# Altium PCB Bodge85_8.PcbDoc
Units mm, origin at the board's own origin, x right, y up, seen from the top; angles counter-clockwise.
Board outline 80 x 50 mm, 2 copper layers (Top Layer, Bottom Layer), stack 1.631 mm thick; 2 components, 30 nets, 167 pads, 0 vias.
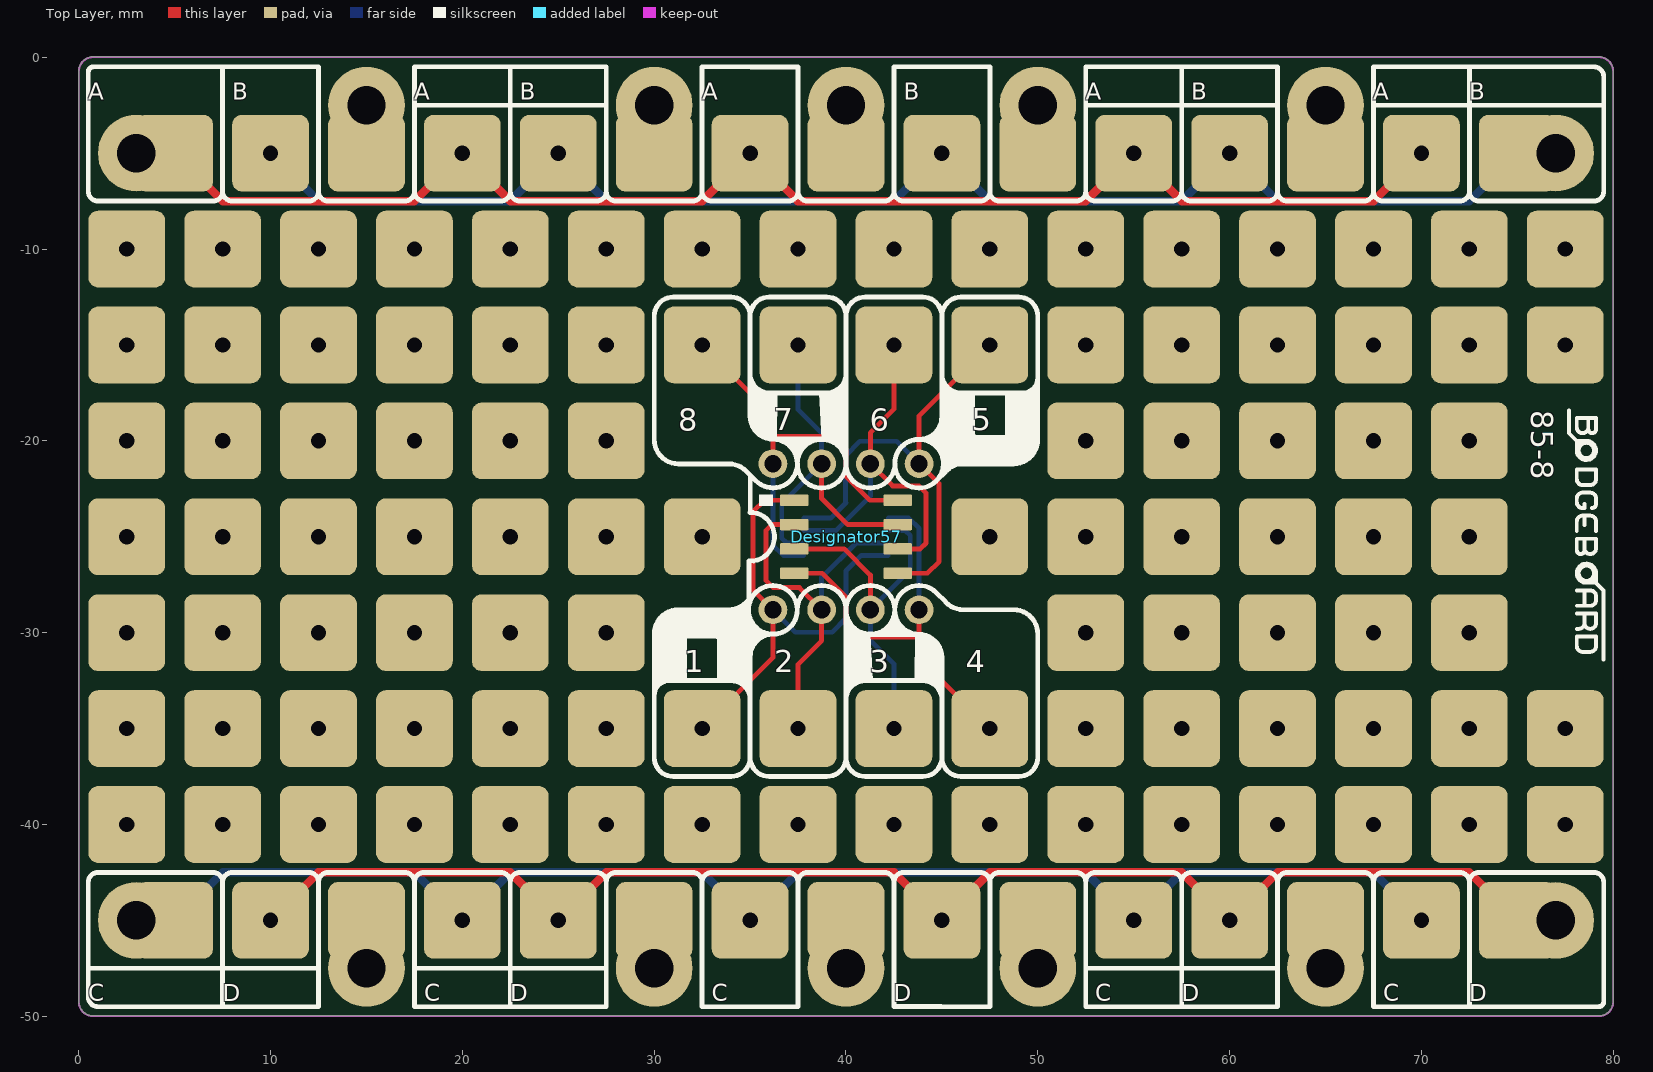
[diagram p0: Top Layer view]
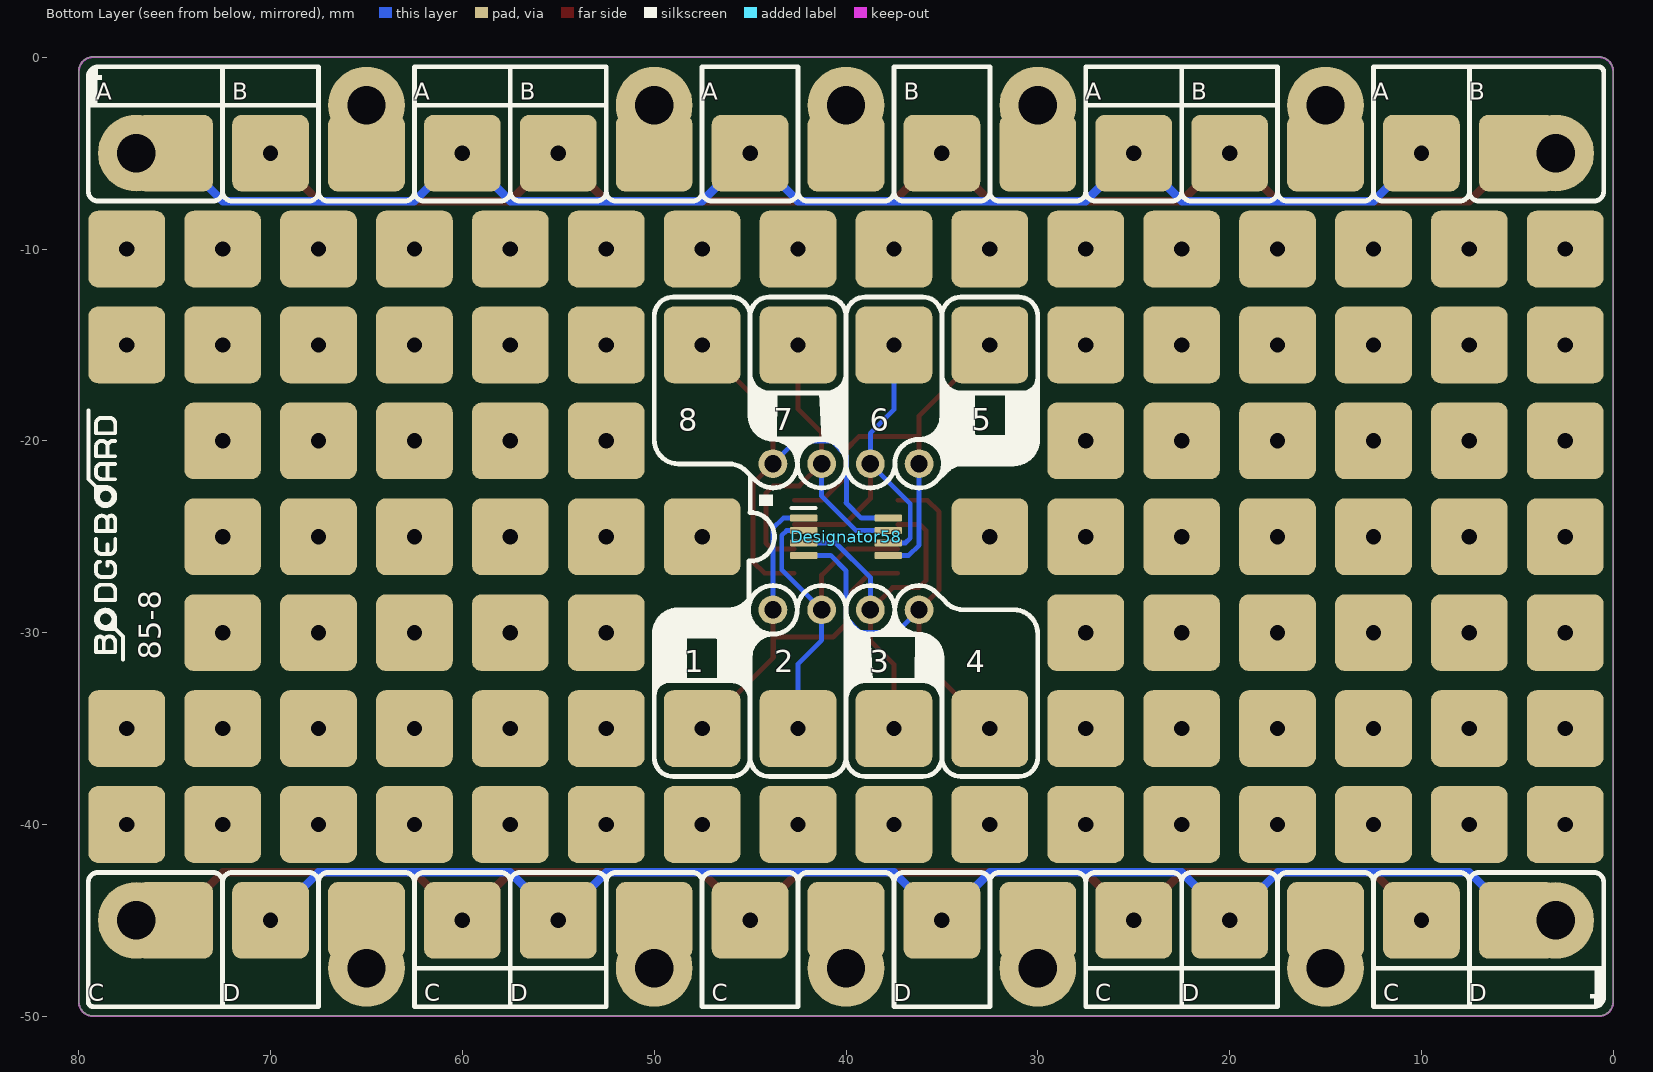
[diagram p1: Bottom Layer view, seen from below]

## Layer stack, top to bottom
Top Solder: solder mask 0.0102, Solder Resist, Dk 3.5
Top Layer: signal copper 0.0356
Dielectric 1: dielectric 1.56, FR-4, Dk 4.8
Bottom Layer: signal copper 0.0356
Bottom Solder: solder mask 0.0102, Solder Resist, Dk 3.5

## Board outline
0.75,-49.975 cw(c0.75,-49.225) 0,-49.225 0,-0.725 cw(c0.75,-0.725) 0.75,0.025 79.25,0.025 cw(c79.25,-0.725) 80,-0.725 80,-49.225 cw(c79.25,-49.225) 79.25,-49.975

## Design rules (kind name [scope] priority, off if disabled: settings)
Clearance [All] p1: gap=0.2 ignorepadtopadclearanceinfootprint=FALSE
MinimumSolderMaskSliver [All] p1: minsoldermaskwidth=0.15
PolygonConnect [All] p1: connectstyle=Relief reliefconductorwidth=0.254 reliefentries=4 polygonreliefangle="90 Angle" airgapwidth=0.254
RoutingVias [All] p1: holewidth=0.4 width=0.8 viastyle="Through Hole" minholewidth=0.3 minwidth=0.4 maxholewidth=0.7 maxwidth=1
SilkToSilkClearance [All] p1 off: silktosilkclearance=0
SilkToSolderMaskClearance [IsPad] p1: minsilkscreentomaskgap=0.15 clearancetoexposedcopper=TRUE
SolderMaskExpansion [All] p1: expansion=0.102 istentingtop=FALSE
Width [All] p1: maxlimit=1 minlimit=0.2 preferedwidth=0.5
27 further rules are at their usual default settings.

## Components (designator, comment, footprint, x,y, rotation, side; value= is the part's Value field where it differs from the comment)
Designator57 "Comment" SO127P600X500-8 40,-25 r0 top locked
Designator58 "Comment" SO65P490X300-8 40,-25 r180 bottom locked

## Footprints (in the part's own frame and the unit in brackets; to place one, negate y for a bottom-side part, rotate by r counter-clockwise, add the part's x,y. Pads: shape width x height; smd on the part's side, far side on the other; paste and mask are expansions set on the pad)
SO65P490X300-8 [mm] "SO 0.65mm Pitch , 4.9mm Span, 3.00mm Body width, 8 Pins"
  rrect50% 1.45x0.38 smd paste+0 mask+0.05: 1(-2.2,0.975) 2(-2.2,0.325) 3(-2.2,-0.325) 4(-2.2,-0.975) 5(2.2,-0.975) 6(2.2,-0.325) 7(2.2,0.325) 8(2.2,0.975)
  silkscreen extent -2.85,1.5 -1.58,1.5, body extent -2.45,-1.5 2.45,1.5, height 1.1
SO127P600X500-8 [mm] "SO 1.27mm Pitch, 6.00mm Span, 5mm Body Width, 8 Pins"
  rrect25% 1.5x0.6 smd paste+0 mask+0.05: 1(-2.7,1.905) 2(-2.7,0.635) 3(-2.7,-0.635) 4(-2.7,-1.905) 5(2.7,-1.905) 6(2.7,-0.635) 7(2.7,0.635) 8(2.7,1.905)
  silkscreen extent -2.8,5 -2.35,5, body extent -3,-2.5 3,2.5, height 1.75

## Free pads (board coordinates)
  rrect25% 4x4 hole 0.8 mask+0.1: 1(2.5,-40) 1(2.5,-35) 1(2.5,-30) 1(2.5,-25) 1(2.5,-20) 1(2.5,-15) 1(2.5,-10) 2(7.5,-40) 2(7.5,-35) 2(7.5,-30) 2(7.5,-25) 2(7.5,-20) 2(7.5,-15) 2(7.5,-10) 3(12.5,-40) 3(12.5,-35) 3(12.5,-30) 3(12.5,-25) 3(12.5,-20) 3(12.5,-15) 3(12.5,-10) 4(17.5,-40) 4(17.5,-35) 4(17.5,-30) 4(17.5,-25) 4(17.5,-20) 4(17.5,-15) 4(17.5,-10) 5(22.5,-40) 5(22.5,-35) 5(22.5,-30) 5(22.5,-25) 5(22.5,-20) 5(22.5,-15) 5(22.5,-10) 6(27.5,-40) 6(27.5,-35) 6(27.5,-30) 6(27.5,-25) 6(27.5,-20) 6(27.5,-15) 6(27.5,-10) 6(32.5,-35) 6(32.5,-25) 6(32.5,-15) 7(32.5,-40) 7(32.5,-10) 7(37.5,-35) 7(37.5,-15) 8(37.5,-40) 8(37.5,-10) 8(42.5,-35) 8(42.5,-15) 9(42.5,-40) 9(42.5,-10) 9(47.5,-35) 9(47.5,-25) 9(47.5,-15) 10(47.5,-40) 10(47.5,-10) 11(52.5,-40) 11(52.5,-35) 11(52.5,-30) 11(52.5,-25) 11(52.5,-20) 11(52.5,-15) 11(52.5,-10) 12(57.5,-40) 12(57.5,-35) 12(57.5,-30) 12(57.5,-25) 12(57.5,-20) 12(57.5,-15) 12(57.5,-10) 13(62.5,-40) 13(62.5,-35) 13(62.5,-30) 13(62.5,-25) 13(62.5,-20) 13(62.5,-15) 13(62.5,-10) 14(67.5,-40) 14(67.5,-35) 14(67.5,-30) 14(67.5,-25) 14(67.5,-20) 14(67.5,-15) 14(67.5,-10) 15(72.5,-40) 15(72.5,-35) 15(72.5,-30) 15(72.5,-25) 15(72.5,-20) 15(72.5,-15) 15(72.5,-10) 16(77.5,-40) 16(77.5,-35) 16(77.5,-15) 16(77.5,-10) 23(10,-45) 23(70,-5) 25(20,-45) 25(60,-5) 26(25,-45) 26(55,-5) 33(25,-5) 33(35,-45) 33(45,-5) 33(55,-45) 34(20,-5) 34(35,-5) 34(45,-45) 34(60,-45) 37(10,-5) 37(70,-45)
  round 4 hole 2 mask-0.5: 1(3,-5) 1(15,-47.5) 1(15,-2.5) 1(30,-47.5) 1(30,-2.5) 1(40,-47.5) 1(40,-2.5) 1(50,-47.5) 1(50,-2.5) 1(65,-47.5) 1(65,-2.5) 1(77,-45) 2(3,-45) 2(77,-5)
  round 1.5 hole 0.9: 1(36.19,-28.81) 2(38.73,-28.81) 3(41.27,-28.81) 4(43.81,-28.81) 5(43.81,-21.19) 6(41.27,-21.19) 7(38.73,-21.19) 8(36.19,-21.19)
  rrect25% 4x4 all layers, no hole mask-4: 22(5,-45) 22(75,-5)
  rrect25% 4x4 all layers, no hole mask-5: 24(15,-45) 24(65,-5)
  rrect25% 4x4 all layers, no hole mask-3: 27(30,-45) 27(50,-5) 31(40,-45) 31(40,-5) 32(30,-5) 32(50,-45) 35(15,-5) 35(65,-45) 40(5,-5) 40(75,-45)

## Nets (pads, with @x,y where several pads share a name; then routed paths per layer and width w, separated by ;. In a path a pad name is that pad's centre, name@x,y a point inside that pad or via, vN(x,y) a via of type N, cw(c..) or ccw(c..) an arc to the next point about the centre after c; other vN are vias at no path point)
A: pad.1@3,-5 pad.23@70,-5 pad.26@55,-5 pad.34@20,-5 pad.34@35,-5 pad.40@5,-5 | length 73.3
  Top Layer w0.45: pad.1@5,-5 7.5,-7.5 17.5,-7.5 20,-5 22.5,-7.5 32.5,-7.5 35,-5 37.5,-7.5 52.5,-7.5 55,-5 57.5,-7.5 67.5,-7.5 pad.23@70,-5
B: pad.2@77,-5 pad.22@75,-5 pad.25@60,-5 pad.33@25,-5 pad.33@45,-5 pad.37@10,-5 | length 75.3
  Bottom Layer w0.45: pad.37@10,-5 12.5,-7.5 22.5,-7.5 25,-5 27.5,-7.5 42.5,-7.5 45,-5 47.5,-7.5 57.5,-7.5 60,-5 62.5,-7.5 72.5,-7.5 75,-5 pad.2@77,-5
C: 
D: 
E: 
F: 
G: 
H: 
IO1: 
IO2: pad.1@15,-2.5 pad.35@15,-5
IO3: pad.1@30,-2.5 pad.32@30,-5
IO4: pad.1@40,-2.5 pad.31@40,-5
IO5: 
IO6: pad.1@50,-2.5 pad.27@50,-5
IO7: pad.1@65,-2.5 pad.24@65,-5
IO8: 
IO9: 
IO10: 
IO11: 
IO12: 
IO13: 
IO14: 
UA1: 
UA2: 
UA3: 
UA4: 
UA5: 
UA6: 
UA7: 
UA8: 
pads on no net: Designator57.1 Designator57.2 Designator57.3 Designator57.4 Designator57.5 Designator57.6 Designator57.7 Designator57.8 Designator58.1 Designator58.2 Designator58.3 Designator58.4 Designator58.5 Designator58.6 Designator58.7 Designator58.8
copper on no net: | length 326.5
  Top Layer w0.25: 32.5,-35 36.19,-31.31 ; 32.5,-15 36.19,-18.69 36.19,-21.19 ; 36.19,-19.75 36.215,-19.775 39.325,-19.775 40,-20.45 40,-21.85 41.245,-23.095 41.65,-23.095 42.7,-23.095 ; 37.3,-26.905 38.35,-26.905 38.755,-26.905 40,-28.15 40,-29.55 40.675,-30.225 43.785,-30.225 43.81,-30.25 ; 37.3,-25.635 39.085,-25.635 39.91,-25.635 41.27,-26.995 41.27,-28.81 ; 37.3,-24.365 36.135,-24.365 35.825,-24.675 35.825,-27.275 36.2,-27.65 37.57,-27.65 38.73,-28.81 38.73,-30.42 37.5,-31.65 37.5,-35 ; 37.3,-23.095 36.305,-23.095 35.755,-23.095 35.15,-23.7 35.15,-27.77 36.19,-28.81 ; 38.73,-21.19 38.73,-23.005 40.09,-24.365 40.915,-24.365 42.7,-24.365 ; 42.5,-15 42.5,-18.35 41.27,-19.58 41.27,-21.19 42.43,-22.35 43.8,-22.35 44.175,-22.725 44.175,-25.325 43.865,-25.635 42.7,-25.635 ; 42.7,-26.905 43.695,-26.905 44.245,-26.905 44.85,-26.3 44.85,-22.23 43.81,-21.19 43.81,-18.69 47.5,-15 ; 43.778,-30.225 43.778,-31.278 47.5,-35 ; 43.81,-31.31 43.81,-30.25 ; 43.81,-28.81 43.81,-30.25 ; 36.19,-31.31 36.19,-28.81 ; 36.19,-31.31 36.19,-28.81
  Top Layer w0.45: 10,-45 12.5,-42.5 22.5,-42.5 25,-45 27.5,-42.5 42.5,-42.5 45,-45 47.5,-42.5 57.5,-42.5 60,-45 62.5,-42.5 72.5,-42.5 75,-45
  Bottom Layer w0.25: 36.19,-28.81 37.355,-29.975 39.275,-29.975 40,-29.25 40,-26.775 40.8,-25.975 42.2,-25.975 ; 36.19,-21.19 36.19,-25.44 36.725,-25.975 37.8,-25.975 ; 37.5,-15 37.5,-18.375 38.73,-19.605 38.73,-21.19 36.65,-23.27 36.65,-25.075 36.9,-25.325 37.8,-25.325 ; 37.8,-24.675 39.475,-24.675 41.27,-22.88 41.27,-21.19 ; 37.8,-24.025 39.2,-24.025 40,-23.225 ; 38.73,-28.81 38.73,-27.12 40.525,-25.325 42.2,-25.325 ; 39.975,-23.25 39.975,-20.775 40.725,-20.025 42.645,-20.025 43.81,-21.19 ; 42.2,-24.675 43.1,-24.675 43.35,-24.925 43.35,-26.73 41.27,-28.81 41.27,-30.395 42.5,-31.625 42.5,-35 ; 42.2,-24.025 43.275,-24.025 43.81,-24.56 43.81,-28.81
  Bottom Layer w0.45: 3,-45 5,-45 7.5,-42.5 17.5,-42.5 20,-45 22.5,-42.5 32.5,-42.5 35,-45 37.5,-42.5 52.5,-42.5 55,-45 57.5,-42.5 67.5,-42.5 70,-45

## Keep-outs
Keep-Out Layer:
  lines w0.1: 0,-49.25 ccw(c0.75,-49.25) 0.75,-50 79.25,-50 ccw(c79.25,-49.25) 80,-49.25 80,-0.75 ccw(c79.25,-0.75) 79.25,0 0.75,0 ccw(c0.75,-0.75) 0,-0.75 0,-49.25

## Silkscreen, mask and mechanical layers (free items; w line width, h text height)
Top Overlay:
  drawing of 462 lines, arcs and shapes, not listed
  text "A" at 0.5,-2.5 h1.5
  text "B" at 8,-2.5 h1.5
  text "A" at 17.5,-2.5 h1.5
  text "B" at 23,-2.5 h1.5
  text "A" at 32.5,-2.5 h1.5
  text "B" at 43,-2.5 h1.5
  text "A" at 52.5,-2.5 h1.5
  text "B" at 58,-2.5 h1.5
  text "A" at 67.5,-2.5 h1.5
  text "B" at 72.5,-2.5 h1.5
  text "85-8" at 75.322,-18.4 h2 r270
  text "7" at 36.238,-19.832 h2
  text "8" at 31.25,-19.856 h2
  text "6" at 41.25,-19.856 h2
  text "5" at 46.569,-19.844 h2
  text "1" at 31.569,-32.444 h2
  text "2" at 36.25,-32.456 h2
  text "3" at 41.238,-32.456 h2
  text "4" at 46.25,-32.456 h2
  text "C" at 0.5,-49.5 h1.5
  text "D" at 7.5,-49.5 h1.5
  text "C" at 18,-49.5 h1.5
  text "D" at 22.5,-49.5 h1.5
  text "C" at 33,-49.5 h1.5
  text "D" at 42.5,-49.5 h1.5
  text "C" at 53,-49.5 h1.5
  text "D" at 57.5,-49.5 h1.5
  text "C" at 68,-49.5 h1.5
  text "D" at 72.5,-49.5 h1.5
Bottom Overlay:
  drawing of 416 lines, arcs and shapes, not listed
  text "B" at 7.5,-2.5 h1.5
  text "A" at 12.5,-2.5 h1.5
  text "B" at 22,-2.5 h1.5
  text "A" at 27.5,-2.5 h1.5
  text "B" at 37,-2.5 h1.5
  text "A" at 47.5,-2.5 h1.5
  text "B" at 57,-2.5 h1.5
  text "A" at 62.5,-2.5 h1.5
  text "B" at 72,-2.5 h1.5
  text "A" at 79.1,-2.5 h1.5
  text "7" at 43.763,-19.832 h2
  text "5" at 33.431,-19.844 h2
  text "6" at 38.75,-19.856 h2
  text "8" at 48.75,-19.856 h2
  text "85-8" at 75.322,-31.4 h2 r270
  text "4" at 33.75,-32.456 h2
  text "3" at 38.763,-32.456 h2
  text "2" at 43.75,-32.456 h2
  text "1" at 48.431,-32.444 h2
  text "D" at 7.5,-49.5 h1.5
  text "C" at 12,-49.5 h1.5
  text "D" at 22.5,-49.5 h1.5
  text "C" at 27,-49.5 h1.5
  text "D" at 37.5,-49.5 h1.5
  text "C" at 47,-49.5 h1.5
  text "D" at 57.5,-49.5 h1.5
  text "C" at 62,-49.5 h1.5
  text "D" at 72.5,-49.5 h1.5
  text "C" at 79.5,-49.5 h1.5
Top Solder:
  drawing of 14 lines, arcs and shapes, not listed
Bottom Solder:
  drawing of 14 lines, arcs and shapes, not listed
Mechanical 13:
  circle w0.1: c15.95,-22.5 r0.5
  lines w0.1: 15.05,-23.4 24.95,-23.4 24.95,-16.6 15.05,-16.6 15.05,-23.4
Mechanical 15:
  lines w0.05: 34.75,-29.85 34.75,-20.15 45.25,-20.15 45.25,-29.85 34.75,-29.85
  lines w0.1: 39.5,-25 40.5,-25 ; 40,-25.5 40,-24.5

## Text inside footprints (layer, text, board x,y; h text height)
Designator57: Top Assembly "1" at 36.55,-23.4 h0.4
Designator58: Bottom Assembly "1" at 42.925,-24.225 h0.4